# Altium PCB pay-lim-switch-1.PcbDoc
Units mm, origin at the board's own origin, x right, y up, seen from the top; angles counter-clockwise.
Board outline 20 x 7 mm, 2 copper layers (Top Layer, Bottom Layer); 2 components, 2 nets, 10 pads, 2 vias.
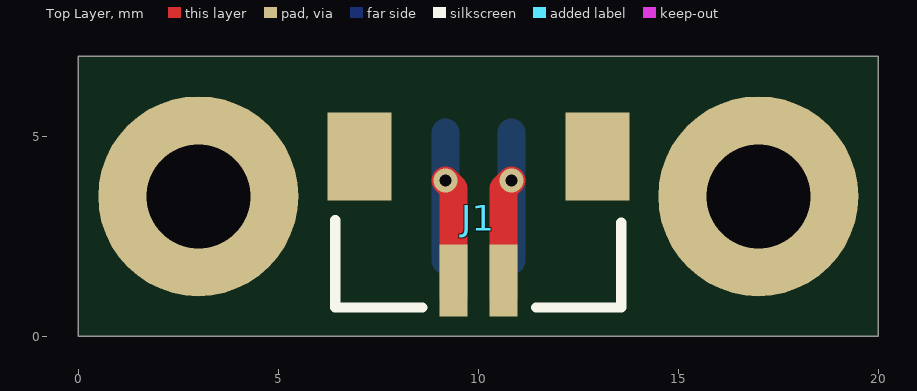
[diagram p0: Top Layer view]
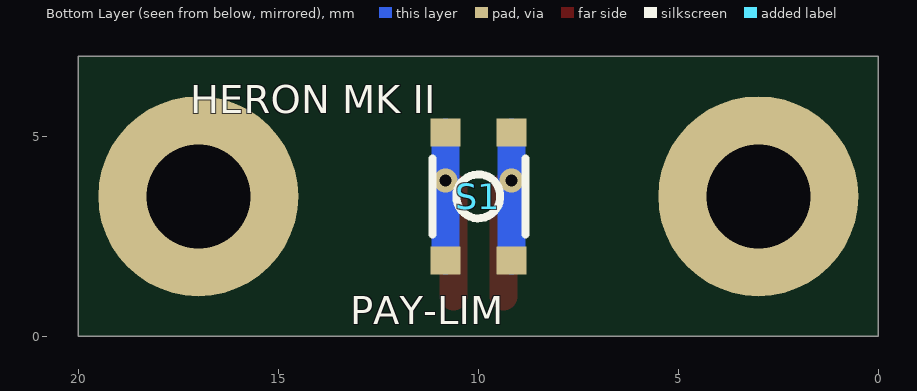
[diagram p1: Bottom Layer view, seen from below]

## Layer stack, top to bottom
Top Solder: solder mask 0.0102, Solder Resist, Dk 3.5
Top Layer: signal copper 0.0356
Dielectric 1: dielectric 0.32, FR-4, Dk 4.8
Bottom Layer: signal copper 0.0356
Bottom Solder: solder mask 0.0102, Solder Resist, Dk 3.5

## Board outline
0,0 0,7 20,7 20,0

## Design rules (kind name [scope] priority, off if disabled: settings)
AssemblyTestPointUsage [All] p1 off:
AssemblyTestpoint [All] p1 off: testpointundercomponent=TRUE minsize=1.016 maxsize=2.54 preferedsize=1.524 minholesize=0 maxholesize=1.016 preferedholesize=0.813 testpointgrid=0.025 usegrid=TRUE gridtolerance=0 allowsidetop=TRUE allowsidebottom=TRUE
BoardOutlineClearance [All] p1: gap=0.5 ignorepadtopadclearanceinfootprint=FALSE
Clearance Component_Clearance [IsComponent vs IsComponent] p1: gap=0.254 ignorepadtopadclearanceinfootprint=FALSE
Clearance [All] p2: gap=0.152 ignorepadtopadclearanceinfootprint=TRUE
FabricationTestPointUsage [All] p1 off: valid=0 allowmultiple=FALSE
FabricationTestpoint [All] p1 off: side=3 testpointundercomponent=FALSE minsize=1.016 maxsize=2.54 preferedsize=1.524 minholesize=0 maxholesize=1.016 preferedholesize=0.813 testpointgrid=0.025 allowsidetop=TRUE allowsidebottom=TRUE usegrid=TRUE gridtolerance=0
HoleSize [All] p1: absolutevalues=TRUE maxlimit=6.3 minlimit=0.3 maxpercent=80.000 minpercent=20.000
HoleToHoleClearance [All] p1: gap=0.2 allowstackedmicrovias=FALSE
MinimumAnnularRing [All] p1: minimumring=0.15
MinimumSolderMaskSliver [All] p1: minsoldermaskwidth=0.1
PlaneClearance [All] p1: clearance=0.381
PlaneConnect [All] p1: planeconnectstyle=Direct reliefexpansion=0.508 reliefentries=4 reliefconductorwidth=0.254 reliefairgap=0.254
PolygonConnect [All] p1: connectstyle=Direct reliefconductorwidth=0.254 reliefentries=4 polygonreliefangle="90 Angle" airgapwidth=0.254
RoutingVias [All] p1: holewidth=0.3 width=0.6 viastyle="Through Hole" minholewidth=0.2 minwidth=0.6 maxholewidth=6.3 maxwidth=10 useviatemplates=TRUE viatemplateguid#1={AE764DF5-DF0F-42B5-970C-4EBE6175E030} viatemplatename#1=v60h30m0mx0(Tol8-8)
SilkToSilkClearance [All] p1: silktosilkclearance=0
SilkToSolderMaskClearance [IsPad] p1: minsilkscreentomaskgap=0.2 clearancetoexposedcopper=TRUE
SolderMaskExpansion [All] p1: expansion=0.051
UnConnectedPin [All] p1:
UnRoutedNet [All] p1: checkbadconnections=TRUE
Width [All] p1: maxlimit=25.4 minlimit=0.152 preferedwidth=0.2
18 further rules are at their usual default settings.

## Components (designator, comment, footprint, x,y, rotation, side; value= is the part's Value field where it differs from the comment)
J1 "DF13A-2P-1.25H(21)" DF13A-2P-1.25H(21) 10,1.2 r0 top
S1 "SW-PB" "PTS830GM140 SMTR LFS - Pushbutton" 10,3.5 r90 bottom

## Footprints (in the part's own frame and the unit in brackets; to place one, negate y for a bottom-side part, rotate by r counter-clockwise, add the part's x,y. Pads: shape width x height; smd on the part's side, far side on the other; paste and mask are expansions set on the pad)
DF13A-2P-1.25H(21) [mm] "2 pos, 1.25mm pitch DF13 connector (H125743CT-ND)"
  rect 0.7x1.8 smd: 1(-0.625,0.2) 2(0.625,0.2)
  rect 1.6x2.2 smd: ""(-2.975,3.3) ""(2.975,3.3)
  silkscreen extent -3.58,-0.48 3.58,1.71, body extent -3.58,-0.48 3.58,6.79, height 3.58
"PTS830GM140 SMTR LFS - Pushbutton" [mm] "Low profile pushbutton"
  rect 0.7x0.75 smd: 1(-1.6,0.825) 1(1.6,0.825) 2(-1.6,-0.825) 2(1.6,-0.825)
  silkscreen extent -0.95,-1.17 0.95,1.15, body extent -1.75,-1.3 1.75,1.3, height 1.4

## Part data
J1: "2 pos DF13 right angle surface mount connector", Supplier Part Number 1=H125743CT-ND, Supplier 1=Digi-Key
S1: library part "Pushbutton - Low Profile", "Schematic symbol for a generic 2-pin pushbutton, OFF-mom.", Supplier Part Number 1=CKN10587CT-ND, Supplier 1=Digi-Key

## Free pads (board coordinates)
  round 5 hole 2.6 unplated: ""(3,3.5) ""(17,3.5)

## Via types
v1: diameter 0.6, hole 0.3, Top Layer to Bottom Layer, tented both sides, 2 vias

## Nets (pads, with @x,y where several pads share a name; then routed paths per layer and width w, separated by ;. In a path a pad name is that pad's centre, name@x,y a point inside that pad or via, vN(x,y) a via of type N, cw(c..) or ccw(c..) an arc to the next point about the centre after c; other vN are vias at no path point)
NetJ1_1: J1.1 S1.2 | length 6.2
  Top Layer w0.7: v1(9.175,3.9) 9.375,3.7 J1.1@9.375,1
  Bottom Layer w0.7: S1.2@9.175,1.9 9.175,3.4 S1.2@9.175,5.1
NetJ1_2: J1.2 S1.1 | length 6.2
  Top Layer w0.7: J1.2@10.625,1 10.625,3.7 v1(10.825,3.9)
  Bottom Layer w0.7: S1.1@10.825,1.9 10.825,3.4 S1.1@10.825,5.1
pads on no net: J1.

## Silkscreen, mask and mechanical layers (free items; w line width, h text height)
Bottom Overlay:
  text "HERON MK II" at 17.2,5.579 h0.7
  text "PAY-LIM" at 13.2,0.3 h0.7
Route Tool Path:
  the board outline again, w0.152